# Altium PCB ESP32_Seperate.PcbDoc
Units mil, origin at the board's own origin, x right, y up, seen from the top; angles counter-clockwise.
Board outline 1290 x 2360 mil, 4 copper layers (Top Layer, GND, PWR, Bottom Layer), stack 23.756 mil thick; 19 components, 40 nets, 130 pads, 34 vias.
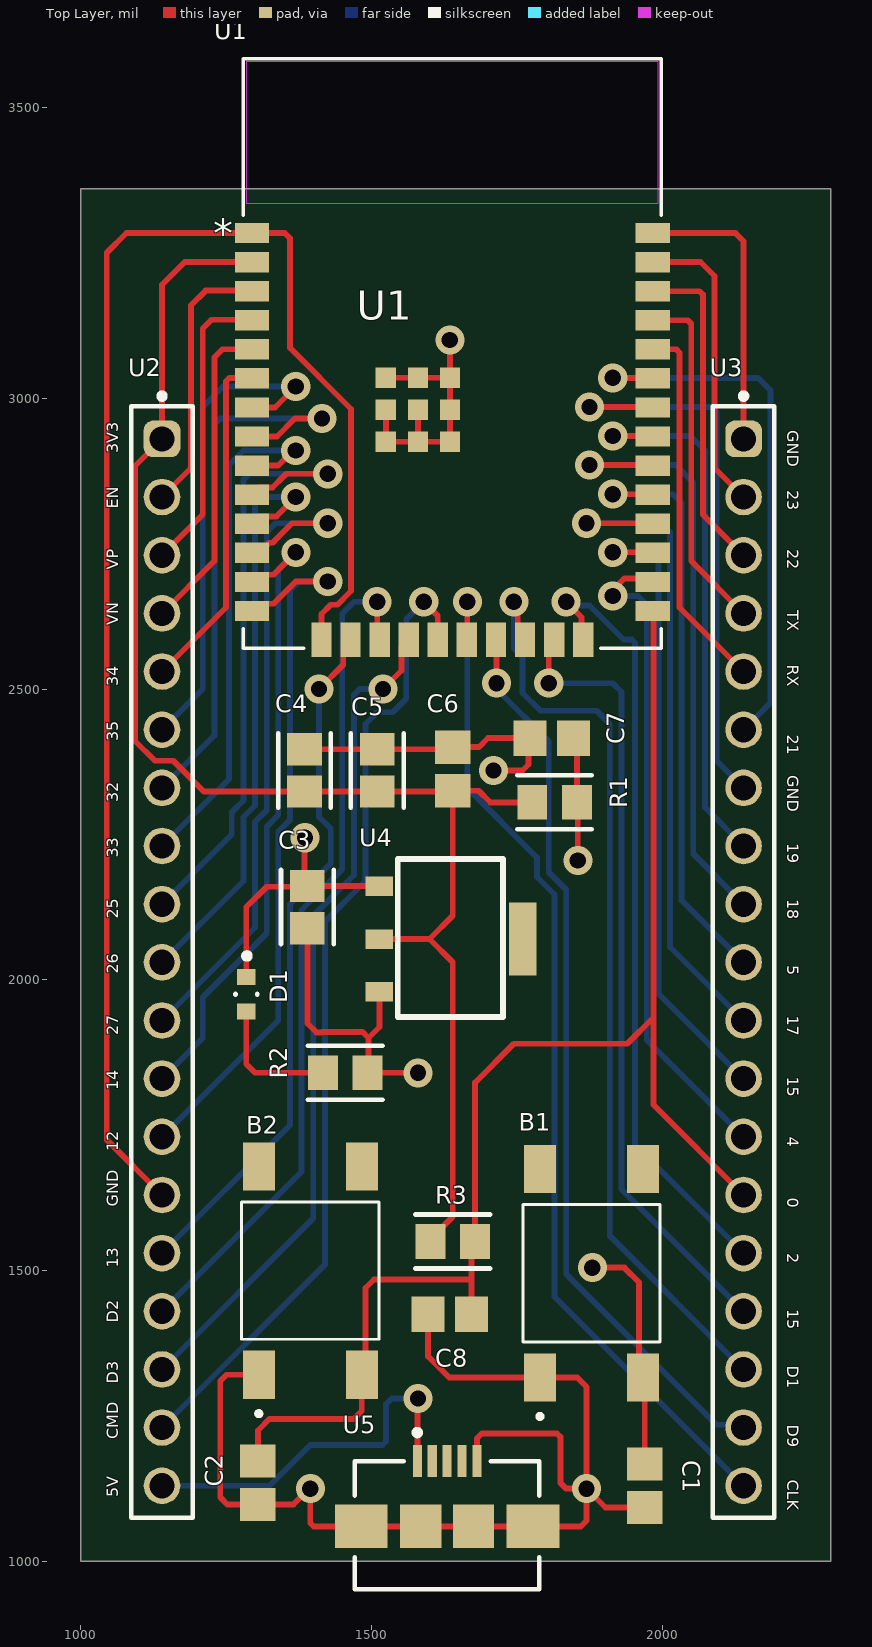
[diagram p0: Top Layer view]
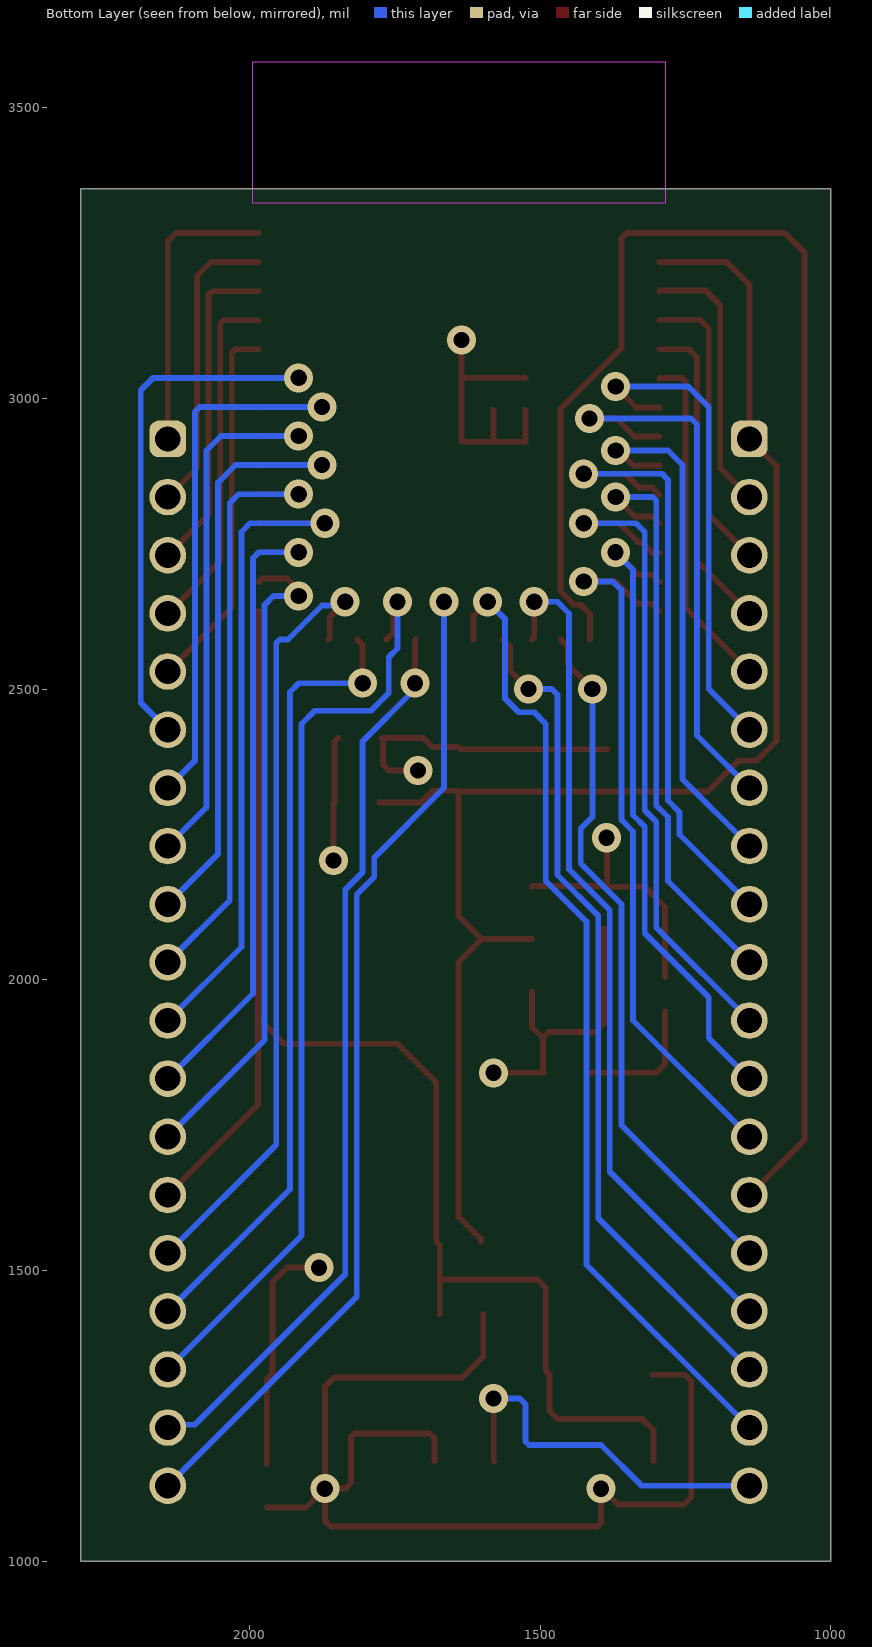
[diagram p1: Bottom Layer view, seen from below]
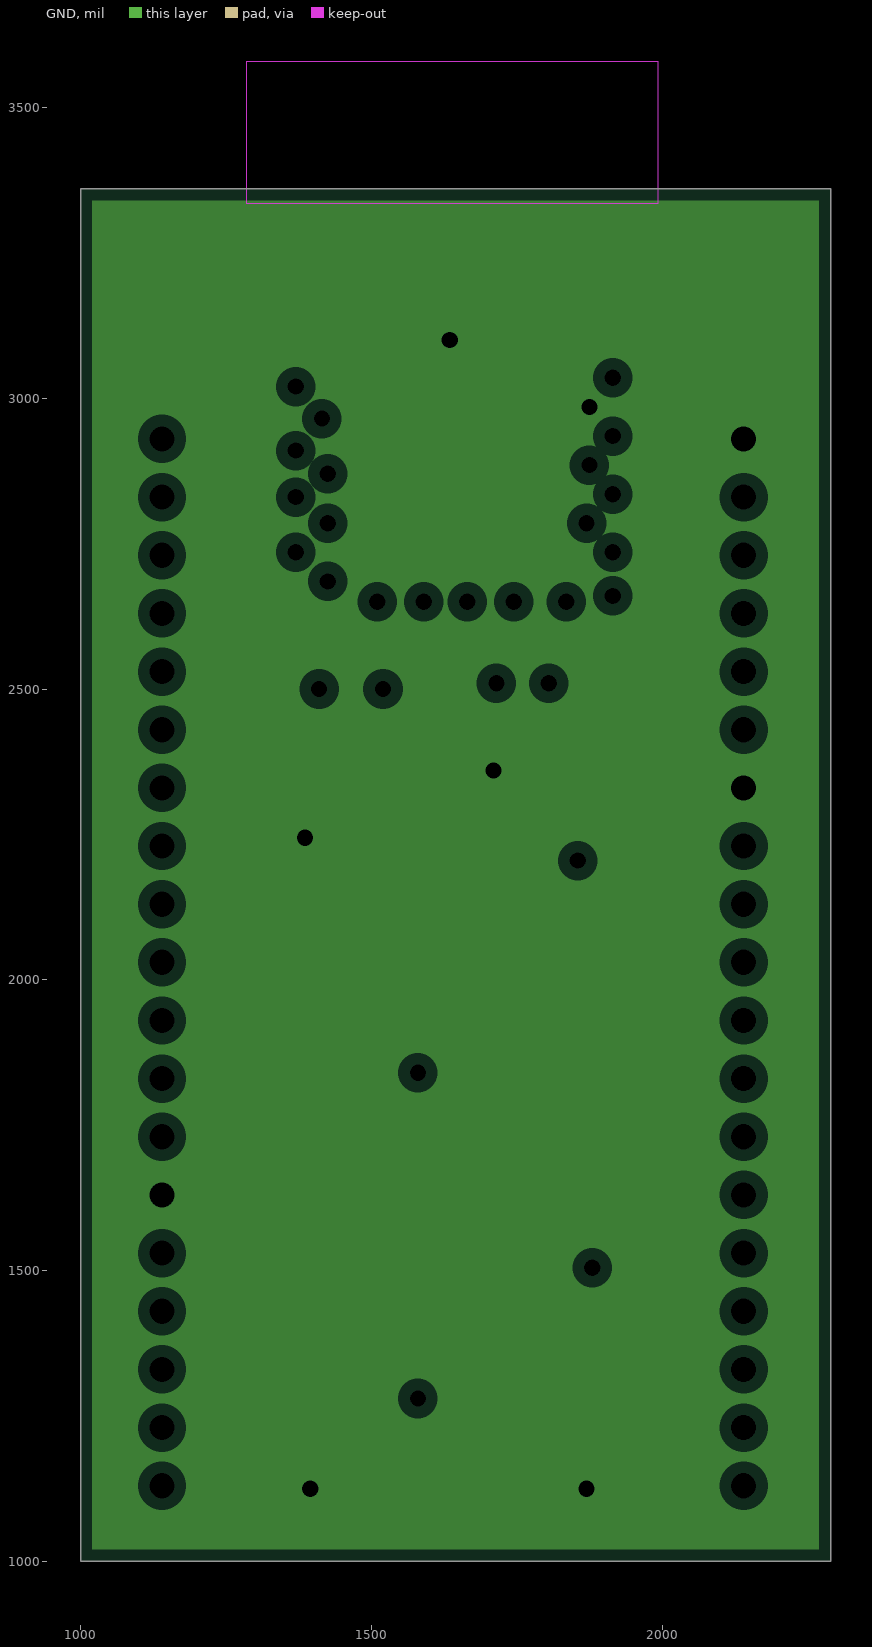
[diagram p2: GND, clearances drawn from the general rule]
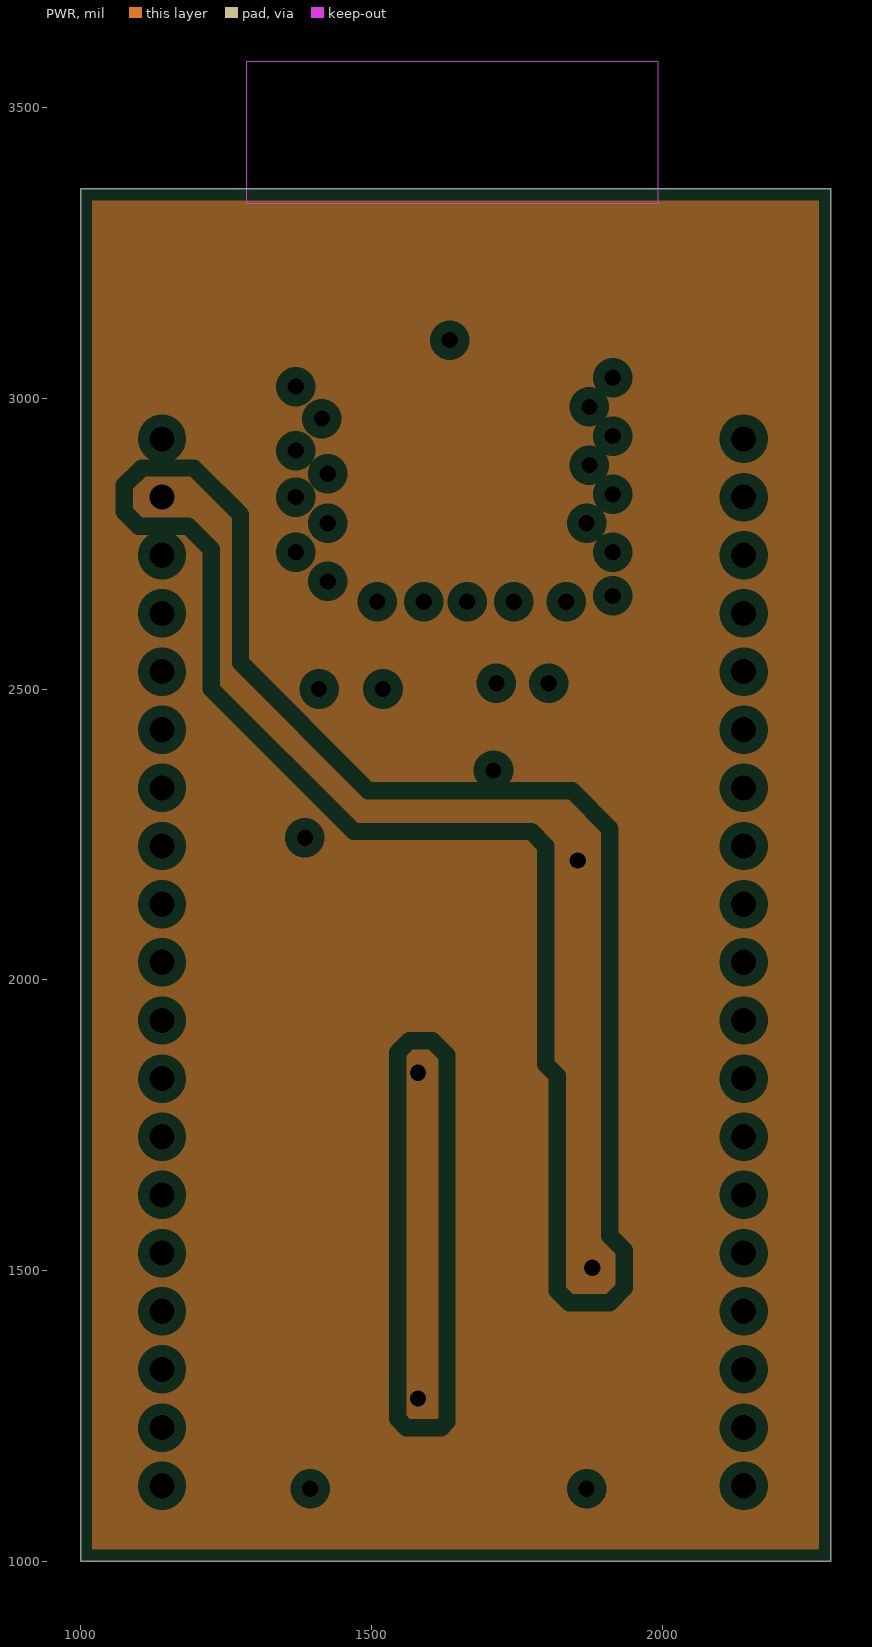
[diagram p3: PWR, clearances drawn from the general rule]
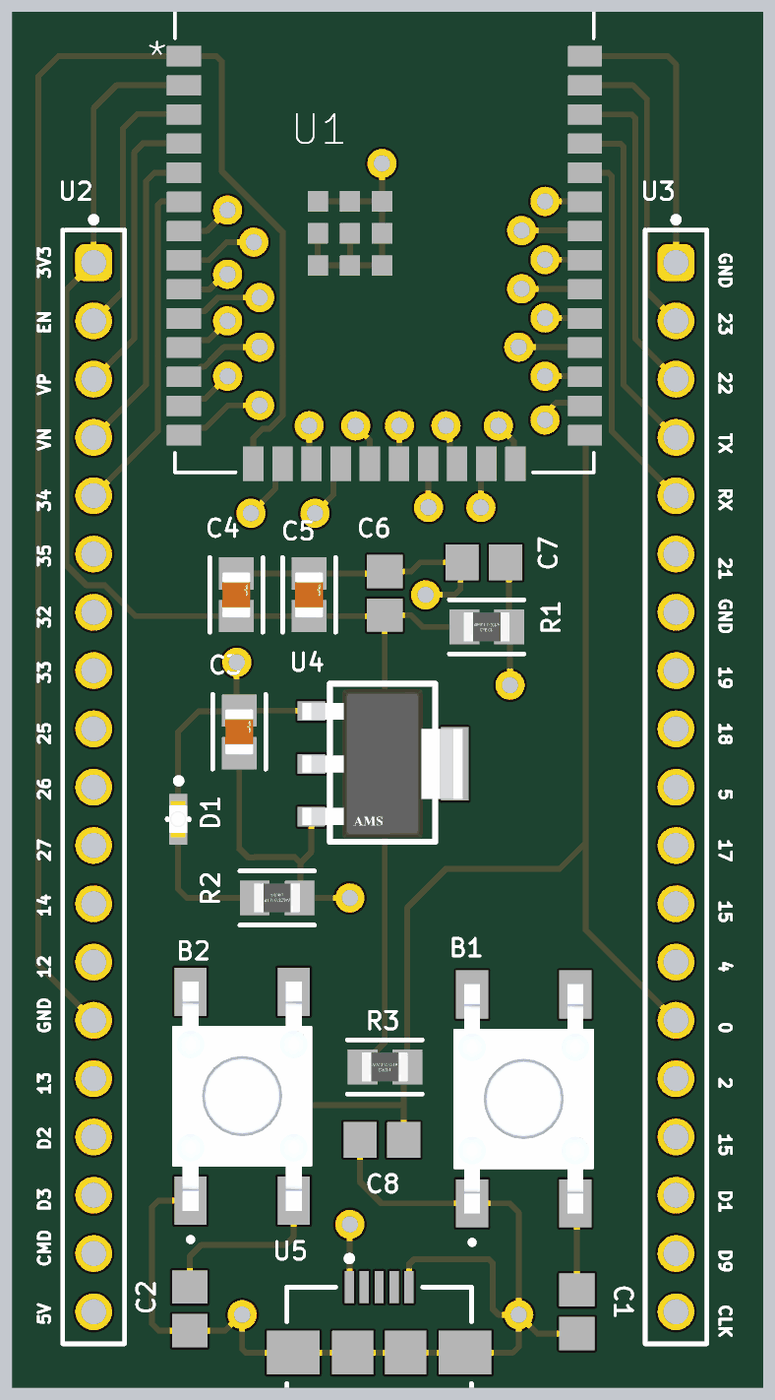
[diagram p4: 3D render of the assembled board from above, using the file's embedded part models]

## Layer stack, top to bottom
Top Solder: solder mask 0.4, Solder Resist, Dk 3.5
Top Layer: signal copper 1.4
Dielectric 2: prepreg 2.8, PP-006, Dk 4.1
GND: plane copper 1.378, net GND
Dielectric 1: dielectric 12.6, FR-4, Dk 4.8
PWR: plane copper 1.378
Dielectric 3: prepreg 2.8, PP-006, Dk 4.1
Bottom Layer: signal copper 1.4
Bottom Solder: solder mask 0.4, Solder Resist, Dk 3.5

## Board outline
1000,1000 2290,1000 2290,3360 1000,3360

## Design rules (kind name [scope] priority, off if disabled: settings)
Clearance [All] p1: gap=5 ignorepadtopadclearanceinfootprint=FALSE
PlaneClearance [All] p1: clearance=20
PlaneConnect [All] p1: planeconnectstyle=Relief reliefexpansion=20 reliefentries=4 reliefconductorwidth=10 reliefairgap=10
PolygonConnect [All] p1: connectstyle=Relief reliefconductorwidth=10 reliefentries=4 polygonreliefangle="90 Angle" airgapwidth=10
RoutingVias [All] p1: holewidth=28 width=50 viastyle="Through Hole" minholewidth=28 minwidth=50 maxholewidth=28 maxwidth=50
SolderMaskExpansion [All] p1: expansion=4 istentingtop=FALSE
SupplyNets "Schematic Supply Nets" [InNet('GND')] p1: voltage=0.000
Width [All] p1: maxlimit=10 minlimit=10 preferedwidth=10
28 further rules are at their usual default settings.

## Classes and differential pairs
component class Main_board: C7 R1 U2 U3
component class ESP32: C5 C6 U1
component class Designator: C3 C4 R2 U4
component class Connector: U5
component class Buttons: B1 B2 C1 C2

## Components (designator, comment, footprint, x,y, rotation, side; value= is the part's Value field where it differs from the comment)
B1 "EN" SW_TS04-66-43-BK-100-SMT 1878.53,1495.2 r90 top
B2 "Boot" SW_TS04-66-43-BK-100-SMT 1395,1500 r90 top
C1 "100nF" CAPC2013X140X45ML15T25 1970,1130 r90 top
C2 "100nF" CAPC2013X140X45ML15T25 1305,1135 r90 top
C3 "22u" FP-GRM21B-0_15-IPC_A 1390,2125 r90 top value=22µF
C4 "22u" FP-GRM21B-0_15-IPC_A 1385,2360 r90 top value=22µF
C5 "22u" FP-GRM21B-0_15-IPC_A 1510,2360 r90 top value=22µF
C6 "100nF" CAPC2013X140X45ML15T25 1640,2362.6 r270 top
C7 "100nF" CAPC2013X140X45ML15T25 1809.97,2415.59 r0 top
C8 "100nF" CAPC2013X140X45ML15T25 1635,1425 r0 top (schematic designator C7)
D1 "Comment" FP-APHD1608LZGCK-MFG 1285,1975 r270 top
R1 "10k" FP-CRGCQ0805-IPC_A 1815,2305 r180 top value=10kΩ
R2 "2k" FP-CRGCQ0805-IPC_A 1455,1840 r0 top value=2kΩ
R3 "10k" FP-CRGCQ0805-IPC_A 1640,1550 r180 top value=10kΩ (schematic designator R1)
U1 "ESP32-WROOM-32E-N4" ESP32­WROOM­32E_EXP 1639.2,3077 r0 top
U2 "19 Pin Headers (left)" "19 Pin headers" 1140,2930 r0 top
U3 "19 Pin Headers (right)" "19 Pin headers" 2140,2930 r0 top
U4 "AMS1117-3.3" AMS1117 1513.94,2160.55 r0 top
U5 "10104110-0001LF (2)" FCI-10104110-0001LF_V 1630.28,1116.1 r0 top

## Footprints (in the part's own frame and the unit in brackets; to place one, negate y for a bottom-side part, rotate by r counter-clockwise, add the part's x,y. Pads: shape width x height; smd on the part's side, far side on the other; paste and mask are expansions set on the pad)
"19 Pin headers" [mm]
  rrect50% 1.6x1.6 hole 1.1: 1(0,0)
  round 1.6 hole 1.1: 2(0,-2.54) 3(0,-5.08) 4(0,-7.62) 5(0,-10.16) 6(0,-12.7) 7(0,-15.24) 8(0,-17.78) 9(0,-20.32) 10(0,-22.86) 11(0,-25.4) 12(0,-27.94) 13(0,-30.48) 14(0,-33.02) 15(0,-35.56) 16(0,-38.1) 17(0,-40.64) 18(0,-43.18) 19(0,-45.72)
  silkscreen extent -1.35,-47.12 1.35,1.99
AMS1117 [mm]
  rect 1.2x0.85 smd: 1(0,0) 2(0,-4.6) 2(0,-2.3)
  rect 1.2x3.2 smd: 4(6.25,-2.3)
  silkscreen extent 0.8,-5.7 5.4,1.2, body extent -1.15,-5.8 7.35,1.2, height 0.25
CAPC2013X140X45ML15T25 [mm] "Chip Capacitor, 2-Leads, Body 2.00x1.25mm, IPC Low Density"
  rect 1.45x1.55 smd: 1(-0.95,0) 2(0.95,0)
  body extent -1.08,-0.7 1.07,0.7, height 1.4
ESP32­WROOM­32E_EXP [mil]
  rect 59x35 smd paste+0 mask+0: 1(-344.5,207.1) 2(-344.5,157.1) 3(-344.5,107.1) 4(-344.5,57.1) 5(-344.5,7.1) 6(-344.5,-42.9) 7(-344.5,-92.9) 8(-344.5,-142.9) 9(-344.5,-192.9) 10(-344.5,-242.9) 11(-344.5,-292.9) 12(-344.5,-342.9) 13(-344.5,-392.9) 14(-344.5,-442.9) 25(344.5,-442.9) 26(344.5,-392.9) 27(344.5,-342.9) 28(344.5,-292.9) 29(344.5,-242.9) 30(344.5,-192.9) 31(344.5,-142.9) 32(344.5,-92.9) 33(344.5,-42.9) 34(344.5,7.1) 35(344.5,57.1) 36(344.5,107.1) 37(344.5,157.1) 38(344.5,207.1)
  rect 35x59 smd paste+0 mask+0: 15(-225,-492.15) 16(-175,-492.15) 17(-125,-492.15) 18(-75,-492.15) 19(-25,-492.15) 20(25,-492.15) 21(75,-492.15) 22(125,-492.15) 23(175,-492.15) 24(225,-492.15)
  rect 35x35 smd paste+0 mask+0: 39(-59.1,-96.9) 40(-114.2,-41.8) 41(-114.2,-96.9) 42(-114.2,-152) 43(-59.1,-152) 44(-4,-152) 45(-4,-96.9) 46(-4,-41.8) 47(-59.1,-41.8)
  Keep-Out Layer region: 354.5,258 354.5,502 -354.5,502 -354.5,258
  silkscreen extent -360,-507 360,507
FCI-10104110-0001LF_V [mm] "SMD, 5-Leads, Body 8.06x5.6mm, Pitch 0.65mm"
  rect 0.4x1.4 smd: 1(-1.3,1.425) 2(-0.65,1.425) 3(0,1.425) 4(0.65,1.425) 5(1.3,1.425)
  rect 1.8x1.9 smd: 6(-1.15,-1.425) 7(1.15,-1.425)
  rect 2.3x1.9 smd: 8(-3.75,-1.425) 9(3.75,-1.425)
  silkscreen extent -4.03,-4.17 4.03,2.8, body extent -4.03,-4.17 4.03,1.43, height 2.95
FP-APHD1608LZGCK-MFG [mm]
  rect 0.7x0.8 smd paste+0 mask+0: 1(-0.75,0) 2(0.75,0)
  silkscreen extent -1.8,-0.48 0.03,0.48, body extent -1.2,-0.58 1.2,0.58, height 0.25
FP-CRGCQ0805-IPC_A [mil]
  rect 51.42x59.44 smd paste+0 mask+0: 1(-38.43,0) 2(38.43,0)
  silkscreen extent -64,-46 64,46, body extent -84,-49 84,49, height 10
FP-GRM21B-0_15-IPC_A [mil]
  rect 55.34x59.38 smd paste+0 mask+0: 1(-36.47,0) 2(36.47,0)
  silkscreen extent -64,-45 64,45, body extent -84,-49 84,49, height 10
SW_TS04-66-43-BK-100-SMT [mm]
  rect 2.1x1.4 smd: 1(-4.55,2.25) 2(-4.55,-2.25) 3(4.55,2.25) 4(4.55,-2.25)
  silkscreen extent -6.35,-3 3,3, body extent -5,-3 5,3, height 4.3

## Part data
B1 B2: library part TS04-66-50-BK-160-SMT-TR_1, "6 x 6 mm, 5 mm Actuator Height, 160 gf, Black, Surface Mount, SPST, Tactile Switch", Manufacturer="Same Sky", Manufacturer Part Number=TS04-66-50-BK-160-SMT-TR, Supplier Part Number=2223-TS04-66-50-BK-160-SMT-TR-ND, Category="Tactile Switches", ComponentLink1Description=https://datasheet.octopart.com:443/TS04-66-50-BK-160-SMT-TR-Same-Sky-datasheet-183540778.pdf?src-supplier=Same+Sky, ComponentLink1URL=https://datasheet.octopart.com:443/TS04-66-50-BK-160-SMT-TR-Same-Sky-datasheet-183540778.pdf?src-supplier=Same+Sky, ComponentLink2Description=https://datasheet.octopart.com:443/TS04-66-50-BK-160-SMT-TR-Same-Sky-datasheet-181920469.pdf?src-supplier=Same+Sky, ComponentLink2URL=https://datasheet.octopart.com:443/TS04-66-50-BK-160-SMT-TR-Same-Sky-datasheet-181920469.pdf?src-supplier=Same+Sky, ComponentLink3Description=https://datasheet.octopart.com:443/TS04-66-50-BK-160-SMT-TR-CUI-Devices-datasheet-175928975.pdf?src-supplier=Same+Sky, ComponentLink3URL=https://datasheet.octopart.com:443/TS04-66-50-BK-160-SMT-TR-CUI-Devices-datasheet-175928975.pdf?src-supplier=Same+Sky, ComponentLink4Description=https://datasheet.octopart.com:443/TS04-66-50-BK-160-SMT-TR-CUI-Devices-datasheet-155929909.pdf?src-supplier=Same+Sky, ComponentLink4URL=https://datasheet.octopart.com:443/TS04-66-50-BK-160-SMT-TR-CUI-Devices-datasheet-155929909.pdf?src-supplier=Same+Sky, ComponentLink5Description=https://datasheet.octopart.com:443/TS04-66-50-BK-160-SMT-TR-CUI-Devices-datasheet-180438940.pdf?src-supplier=IHS, ComponentLink5URL=https://datasheet.octopart.com:443/TS04-66-50-BK-160-SMT-TR-CUI-Devices-datasheet-180438940.pdf?src-supplier=IHS, ComponentLink6Description=https://datasheet.octopart.com:443/TS04-66-50-BK-160-SMT-TR-Same-Sky-datasheet-182881590.pdf?src-supplier=Master+Electronics, ComponentLink6URL=https://datasheet.octopart.com:443/TS04-66-50-BK-160-SMT-TR-Same-Sky-datasheet-182881590.pdf?src-supplier=Master+Electronics, ComponentLink7Description=https://datasheet.octopart.com:443/TS04-66-50-BK-160-SMT-TR-Same-Sky-datasheet-189105765.pdf?src-supplier=Master+Electronics, ComponentLink7URL=https://datasheet.octopart.com:443/TS04-66-50-BK-160-SMT-TR-Same-Sky-datasheet-189105765.pdf?src-supplier=Master+Electronics, ComponentLink8Description=https://datasheet.octopart.com:443/TS04-66-50-BK-160-SMT-TR-Same-Sky-datasheet-188930959.pdf?src-supplier=TME, ComponentLink8URL=https://datasheet.octopart.com:443/TS04-66-50-BK-160-SMT-TR-Same-Sky-datasheet-188930959.pdf?src-supplier=TME, ComponentLink9Description=https://octopart.com:443/opatz8j6/c1?t=AHJHVxjaiIDIr6H_ItDqsJeDJqxcW_gJHqcHV2sr14xMipfx-HDzg_f0vkasGYHy5q-Btyt4jzHIYsIXAp8M-MkPAGFwjUVKwjpKunO9EjmQ9NoVu9p4HWs04ZXCmleWgcsYh-4RxiTzSsoULU2T2rz17cMXYYLK9_ziMcA7OGPXXbacYiPMCPpI60niI4dc0C9vNkjd65Jl5QkLrYSw83J7uaIpN8OeAtGX54ooF_yVEqS3W8UGSl3Fipt3e-uZfnOteh1ynDY5inV3vA_T2G7-jmG30-JmWZ9wvWQwyL_V03hDFAcYksLWHd1aRsOPWTbxvmd88SKpkAjFm5xu5x-cK5AUD6xUpAL7lh0xeIYzTPI4ZOg&src-supplier=Compliance+Statements, ComponentLink9URL=https://octopart.com:443/opatz8j6/c1?t=AHJHVxjaiIDIr6H_ItDqsJeDJqxcW_gJHqcHV2sr14xMipfx-HDzg_f0vkasGYHy5q-Btyt4jzHIYsIXAp8M-MkPAGFwjUVKwjpKunO9EjmQ9NoVu9p4HWs04ZXCmleWgcsYh-4RxiTzSsoULU2T2rz17cMXYYLK9_ziMcA7OGPXXbacYiPMCPpI60niI4dc0C9vNkjd65Jl5QkLrYSw83J7uaIpN8OeAtGX54ooF_yVEqS3W8UGSl3Fipt3e-uZfnOteh1ynDY5inV3vA_T2G7-jmG30-JmWZ9wvWQwyL_V03hDFAcYksLWHd1aRsOPWTbxvmd88SKpkAjFm5xu5x-cK5AUD6xUpAL7lh0xeIYzTPI4ZOg&src-supplier=Compliance+Statements, ComponentLink10Description=https://octopart.com:443/opatz8j6/c1?t=r1RK5IYUaob_85_1MSHGNq720LrhxWIvMn5DWdcJs86yyX1sCCzkutHExn9MWrIEn17t5vGoIZESqBBoujGJDEtnxSOKhQoF_HVCF4IjS0uNejDB1Hl06RViT7vLEqlS2nwCB_zZjOM2FBR17Cn3AygDXFz4irEFvfs5L25X4mfGCJscXkgX4qD28LidoQEhTj1XIrzkPBX_u6sUrCtXeGFsnQuDshvHBQ8JL4sZA9KNYQB46zrK0ZjbAVBq3PHdFimw1lZsdT1205N9iIZQ-sSyoeN1xzltvm_fFJtkrMx3uypwSCqRIIazHEyIss7CzzZHpr8HJ3IPX8N9BpeGudVq5MGf4iJVtCZae_yLFL5H-ssn_Jcg6fiM&src-supplier=Compliance+Statements, ComponentLink10URL=https://octopart.com:443/opatz8j6/c1?t=r1RK5IYUaob_85_1MSHGNq720LrhxWIvMn5DWdcJs86yyX1sCCzkutHExn9MWrIEn17t5vGoIZESqBBoujGJDEtnxSOKhQoF_HVCF4IjS0uNejDB1Hl06RViT7vLEqlS2nwCB_zZjOM2FBR17Cn3AygDXFz4irEFvfs5L25X4mfGCJscXkgX4qD28LidoQEhTj1XIrzkPBX_u6sUrCtXeGFsnQuDshvHBQ8JL4sZA9KNYQB46zrK0ZjbAVBq3PHdFimw1lZsdT1205N9iIZQ-sSyoeN1xzltvm_fFJtkrMx3uypwSCqRIIazHEyIss7CzzZHpr8HJ3IPX8N9BpeGudVq5MGf4iJVtCZae_yLFL5H-ssn_Jcg6fiM&src-supplier=Compliance+Statements, ComponentLink11Description=https://octopart.com:443/opatz8j6/c1?t=3BD6yHY4TMlPV1HdH1DfP3VwhdawlDk5uvE--lE0_OK2pMAHtXMzIWognZT8Kptg4hg-lGvkc8pM6295M0wnT2xUdro5X27lLiJF0vFSPDXW_Zl-47ruo4eQI3juyTTFsaQzGMRqd6HKVavC7jLqvg3e4wdyFRwHDNXvJFlQdNWuFbKytLsG4A2-4ydZK6E80O1irTcqN9MKGvI5XzA0YOv-CaSdIebfUu8zXvQJfIAIYzNrnKqCZgH7inlQIWZHKFLA1siN4vk2QxKmFGOy5iNd7qtG1c_EzzRGUuEk66hak1i00a4FRPnHP1sGNuLupUBDn3O7toNEWVdlsVQMt_vgglZqqjFBUsOjgP800DIecR_OMlE&src-supplier=Compliance+Statements, ComponentLink11URL=https://octopart.com:443/opatz8j6/c1?t=3BD6yHY4TMlPV1HdH1DfP3VwhdawlDk5uvE--lE0_OK2pMAHtXMzIWognZT8Kptg4hg-lGvkc8pM6295M0wnT2xUdro5X27lLiJF0vFSPDXW_Zl-47ruo4eQI3juyTTFsaQzGMRqd6HKVavC7jLqvg3e4wdyFRwHDNXvJFlQdNWuFbKytLsG4A2-4ydZK6E80O1irTcqN9MKGvI5XzA0YOv-CaSdIebfUu8zXvQJfIAIYzNrnKqCZgH7inlQIWZHKFLA1siN4vk2QxKmFGOy5iNd7qtG1c_EzzRGUuEk66hak1i00a4FRPnHP1sGNuLupUBDn3O7toNEWVdlsVQMt_vgglZqqjFBUsOjgP800DIecR_OMlE&src-supplier=Compliance+Statements, ComponentLink12Description=https://octopart.com:443/opatz8j6/c1?t=K3camy5c4Ucy_9yJ3KoVII-gY7VkFhW7P0bbZ5t4-ZUOrBjcTQp1Z0CfWV0BYFVb-fHwcr_lEptVhsKeusTQzSTvOQJoYc4MNj1Xi9Ce_YgscQjK650kyvQ9iLNiSq5mGOGzGFNePsfH6U4F6nSSG09sMoZOKXesSp3A9fEB81Ryg-V7UjN_ervOIvTSSU2pt4tfCkzqxWFsAWFQreVmjyuPQN_MUGuEn3zVyQx51WI-SEu-6b7QOUpGr0zjb-yB96bbP6EohUbR0VIhPKN-WK5D9Ild7BKF3VkdDbQsJZ5I28NoVyQVl5xozYnhRN5Qb2QQksLBhOvdnNRmi85i763lg0Pnr8-dc4-8tEY2vuhnMptderCnXY8-&src-supplier=Compliance+Statements, ComponentLink12URL=https://octopart.com:443/opatz8j6/c1?t=K3camy5c4Ucy_9yJ3KoVII-gY7VkFhW7P0bbZ5t4-ZUOrBjcTQp1Z0CfWV0BYFVb-fHwcr_lEptVhsKeusTQzSTvOQJoYc4MNj1Xi9Ce_YgscQjK650kyvQ9iLNiSq5mGOGzGFNePsfH6U4F6nSSG09sMoZOKXesSp3A9fEB81Ryg-V7UjN_ervOIvTSSU2pt4tfCkzqxWFsAWFQreVmjyuPQN_MUGuEn3zVyQx51WI-SEu-6b7QOUpGr0zjb-yB96bbP6EohUbR0VIhPKN-WK5D9Ild7BKF3VkdDbQsJZ5I28NoVyQVl5xozYnhRN5Qb2QQksLBhOvdnNRmi85i763lg0Pnr8-dc4-8tEY2vuhnMptderCnXY8-&src-supplier=Compliance+Statements, Lifecycle Status=Production, Number of Positions=2, Pricing="5000=0.10735 (USD)", REACH SVHC=Yes, RoHS=Compliant, Supplier=DigiKey
C1 C2 C6 C7 C8: library part GCM21BR71E104KA37L, "Ceramic Capacitor, Ceramic, 25V, 10% +Tol, 10% -Tol, X7R, 15% TC, 0.1uF, Surface Mount, 0805", Case Code (Imperial)=0805, Case Code (Metric)=2012, Dielectric=X7R, Dielectric Material=Ceramic, Manufacturer=Murata, Manufacturer Lifecycle Status=NRND, Max Operating Temperature=125°C, Min Operating Temperature=-55°C, Ratings=AEC-Q200, Supplier Part Number=490-14779-1-ND, Tolerance=10%, Voltage Rating=25V, Case/Package=0805, Category="Ceramic Capacitors", ComponentLink1Description=https://datasheet.octopart.com:443/GCM21BR71E104KA37L-Murata-datasheet-141268656.pdf?src-supplier=Geoflip, ComponentLink1URL=https://datasheet.octopart.com:443/GCM21BR71E104KA37L-Murata-datasheet-141268656.pdf?src-supplier=Geoflip, ComponentLink2Description=https://datasheet.octopart.com:443/GCM21BR71E104KA37L-Murata-datasheet-140660253.pdf?src-supplier=Ciiva, ComponentLink2URL=https://datasheet.octopart.com:443/GCM21BR71E104KA37L-Murata-datasheet-140660253.pdf?src-supplier=Ciiva, ComponentLink3Description=https://datasheet.octopart.com:443/GCM21BR71E104KA37L-Murata-datasheet-138719617.pdf?src-supplier=Ciiva, ComponentLink3URL=https://datasheet.octopart.com:443/GCM21BR71E104KA37L-Murata-datasheet-138719617.pdf?src-supplier=Ciiva, ComponentLink4Description=https://datasheet.octopart.com:443/GCM21BR71E104KA37L-Murata-datasheet-128592896.pdf?src-supplier=X-ON, ComponentLink4URL=https://datasheet.octopart.com:443/GCM21BR71E104KA37L-Murata-datasheet-128592896.pdf?src-supplier=X-ON, ComponentLink5Description=https://datasheet.octopart.com/GCM21BR71E104KA37L-Murata-datasheet-14404970.pdf, ComponentLink5URL=https://datasheet.octopart.com/GCM21BR71E104KA37L-Murata-datasheet-14404970.pdf, ComponentLink6Description=http://sigma.octopart.com:80/reach_statement/Murata-company-16.pdf?src-supplier=Compliance+Statements, ComponentLink6URL=http://sigma.octopart.com:80/reach_statement/Murata-company-16.pdf?src-supplier=Compliance+Statements, Depth=1.25mm, Height=1.25mm, Length=2mm, Lifecycle Status=NRND, Manufacturer Part Number=GCM21BR71E104KA37L, Mounting Technology="Surface Mount", Number of Terminals=2, Pricing="1=0.35, 10=0.208, 50=0.1528, 100=0.1358, 500=0.10726, 1000=0.09846 (USD)", Radiation Hardening=No, REACH SVHC=Yes, RoHS=Compliant, Schedule B="8532240020, 8532240020|8532240020|8532240020|8532240020|8532240020", Stock=12316, Supplier=DigiKey, Termination=SMD/SMT, Voltage Rating (DC)=25V, Width=1.25mm
C3 C4 C5: library part GRM21BR61A226ME51L, "0805 22 uF 10 V ±20% Tolerance X5R SMT Multilayer Ceramic Capacitor", Case Code (Imperial)=0805, Case Code (Metric)=2012, Dielectric=X5R, Dielectric Material=Ceramic, Manufacturer=Murata, Manufacturer Lifecycle Status="IN PRODUCTION", Max Operating Temperature=85°C, Min Operating Temperature=-55°C, Supplier Part Number=490-10511-1-ND, Tolerance=20%, Voltage Rating=10V, Case/Package=0805, Category="Ceramic Capacitors", ComponentLink1Description=https://datasheet.octopart.com:443/GRM21BR61A226ME51L-Murata-datasheet-46741949.pdf?src-supplier=element14+APAC, ComponentLink1URL=https://datasheet.octopart.com:443/GRM21BR61A226ME51L-Murata-datasheet-46741949.pdf?src-supplier=element14+APAC, ComponentLink2Description=https://datasheet.octopart.com:443/GRM21BR61A226ME51L-Murata-datasheet-141278167.pdf?src-supplier=Geoflip, ComponentLink2URL=https://datasheet.octopart.com:443/GRM21BR61A226ME51L-Murata-datasheet-141278167.pdf?src-supplier=Geoflip, ComponentLink3Description=https://datasheet.octopart.com:443/GRM21BR61A226ME51L-Murata-datasheet-165579666.pdf?src-supplier=TME, ComponentLink3URL=https://datasheet.octopart.com:443/GRM21BR61A226ME51L-Murata-datasheet-165579666.pdf?src-supplier=TME, ComponentLink4Description=https://datasheet.octopart.com:443/GRM21BR61A226ME51L-Murata-datasheet-81455648.pdf?src-supplier=TME, ComponentLink4URL=https://datasheet.octopart.com:443/GRM21BR61A226ME51L-Murata-datasheet-81455648.pdf?src-supplier=TME, ComponentLink5Description=https://datasheet.octopart.com:443/GRM21BR61A226ME51L-Murata-datasheet-140707522.pdf?src-supplier=Ciiva, ComponentLink5URL=https://datasheet.octopart.com:443/GRM21BR61A226ME51L-Murata-datasheet-140707522.pdf?src-supplier=Ciiva, ComponentLink6Description=https://datasheet.octopart.com:443/GRM21BR61A226ME51L-Murata-datasheet-138744834.pdf?src-supplier=Ciiva, ComponentLink6URL=https://datasheet.octopart.com:443/GRM21BR61A226ME51L-Murata-datasheet-138744834.pdf?src-supplier=Ciiva, ComponentLink7Description=https://datasheet.octopart.com:443/GRM21BR61A226ME51L-Murata-datasheet-22122223.pdf?src-supplier=Future+Electronics, ComponentLink7URL=https://datasheet.octopart.com:443/GRM21BR61A226ME51L-Murata-datasheet-22122223.pdf?src-supplier=Future+Electronics, ComponentLink8Description=https://datasheet.octopart.com/GRM21BR61A226ME51L-Murata-datasheet-12515295.pdf, ComponentLink8URL=https://datasheet.octopart.com/GRM21BR61A226ME51L-Murata-datasheet-12515295.pdf, ComponentLink9Description=https://datasheet.octopart.com/GRM21BR61A226ME51L-Murata-datasheet-12510076.pdf, ComponentLink9URL=https://datasheet.octopart.com/GRM21BR61A226ME51L-Murata-datasheet-12510076.pdf, ComponentLink10Description=https://datasheet.octopart.com/GRM21BR61A226ME51L-Murata-datasheet-11978611.pdf, ComponentLink10URL=https://datasheet.octopart.com/GRM21BR61A226ME51L-Murata-datasheet-11978611.pdf, ComponentLink11Description=https://datasheet.octopart.com/GRM21BR61A226ME51L-Murata-datasheet-10025737.pdf, ComponentLink11URL=https://datasheet.octopart.com/GRM21BR61A226ME51L-Murata-datasheet-10025737.pdf, ComponentLink12Description=https://datasheet.octopart.com/GRM21BR61A226ME51L-Murata-datasheet-8819587.pdf, ComponentLink12URL=https://datasheet.octopart.com/GRM21BR61A226ME51L-Murata-datasheet-8819587.pdf, ComponentLink13Description=https://datasheet.octopart.com/GRM21BR61A226ME51L-Murata-datasheet-14402366.pdf, ComponentLink13URL=https://datasheet.octopart.com/GRM21BR61A226ME51L-Murata-datasheet-14402366.pdf, ComponentLink14Description=http://sigma.octopart.com:80/reach_statement/Murata-company-16.pdf?src-supplier=Compliance+Statements, ComponentLink14URL=http://sigma.octopart.com:80/reach_statement/Murata-company-16.pdf?src-supplier=Compliance+Statements, Depth=1.25mm, Height=1.25mm, Lead Free="Lead Free", Length=2mm, Lifecycle Status=Production, Manufacturer Part Number=GRM21BR61A226ME51L, Material=Ceramic, Mounting Technology="Surface Mount", Number of Terminals=2, Packaging="Cut Tape", Pricing="1=0.19, 10=0.111, 50=0.0788, 100=0.069, 500=0.0526, 1000=0.04756 (USD)", Radiation Hardening=No, REACH SVHC=Yes, RoHS=Compliant, Schedule B="8532240020, 8532240020|8532240020, 8532240020|8532240020|8532240020, 8532240020|8532240020|8532240020|8532240020", Stock=246273, Supplier=DigiKey, Termination=SMD/SMT, Thickness=1.25mm, Voltage Rating (DC)=10V, Weight=9.49709mg, Width=1.25mm
D1: library part APHD1608LZGCK, "Standard LEDs; SMD 0608 Compact Dome Lens LED; 1.6x0.8 mm; Green; (Cut Reel)"
R1 R3: library part CRGCQ0805J10K, "Res Thick Film 0805 10K Ohm 5% 0.125W(1/8W) ±100ppm/C Pad SMD Automotive T/R", Ambient Temperature Range High=70°C, Manufacturer="TE Connectivity", Manufacturer Lifecycle Status=ACTIVE, Max Operating Temperature=155°C, Min Operating Temperature=-55°C, Operating Supply Voltage=150V, Power Dissipation=125mW, Supplier Part Number=A130140CT-ND, Temperature Coefficient=100ppm/°C, Tolerance=5%, Category="Chip SMD Resistors", China RoHS=Non-Compliant, ComponentLink1Description=https://datasheet.octopart.com:443/CRGCQ0805J10K-TE-Connectivity-datasheet-114679081.pdf?src-supplier=Master+Electronics, ComponentLink1URL=https://datasheet.octopart.com:443/CRGCQ0805J10K-TE-Connectivity-datasheet-114679081.pdf?src-supplier=Master+Electronics, ComponentLink2Description=https://datasheet.octopart.com:443/2-2176342-5-TE-Connectivity---AMP-datasheet-189108688.pdf?src-supplier=Master+Electronics, ComponentLink2URL=https://datasheet.octopart.com:443/2-2176342-5-TE-Connectivity---AMP-datasheet-189108688.pdf?src-supplier=Master+Electronics, ComponentLink3Description=https://datasheet.octopart.com:443/CRGCQ0805J10K-TE-Connectivity-datasheet-179161841.pdf?src-supplier=IHS, ComponentLink3URL=https://datasheet.octopart.com:443/CRGCQ0805J10K-TE-Connectivity-datasheet-179161841.pdf?src-supplier=IHS, ComponentLink4Description=https://sigma.octopart.com:443/114702769/technical_drawing/TE-Connectivity-CRGCQ0805J10K.pdf?src-supplier=Sager+Electronics, ComponentLink4URL=https://sigma.octopart.com:443/114702769/technical_drawing/TE-Connectivity-CRGCQ0805J10K.pdf?src-supplier=Sager+Electronics, Composition="Thick Film", Height=550µm, Lifecycle Status=Production, Manufacturer Part Number=CRGCQ0805J10K, Mounting Technology="Surface Mount", Number of Terminals=2, Packaging="Cut Tape", Power Rating=125mW, Pricing="1=0.1, 10=0.031, 25=0.0232, 50=0.0188, 100=0.0153, 250=0.01204, 500=0.01016, 1000=0.00868 (USD)", REACH SVHC=Yes, RoHS=Compliant, Schedule B="8533210025, 8533210025|8533210025|8533210025|8533210025|8533210025, 8533210045", Stock=448725, Supplier=DigiKey, Voltage Rating=150V, Voltage Rating (DC)=150V, Width=1.25mm, Working Voltage=150V
R2: library part 1623173-1, "Res Thick Film 0805 2K Ohm 1% 0.125W(1/8W) ±100ppm/C Pad SMD T/R", Case Code (Imperial)=0805, Case Code (Metric)=2012, Manufacturer="TE Connectivity", Manufacturer Lifecycle Status=ACTIVE, Max Operating Temperature=155°C, Max Power Dissipation=125mW, Min Operating Temperature=-55°C, Number of Resistors=1, Operating Supply Voltage=150V, Temperature Coefficient=100ppm/°C, Tolerance=1%, Case/Package=0805, Category="Chip SMD Resistors", China RoHS=Non-Compliant, ComponentLink1Description=https://datasheet.octopart.com:443/CRG0805F2K0-TE-Connectivity-datasheet-167977698.pdf?src-supplier=IHS, ComponentLink1URL=https://datasheet.octopart.com:443/CRG0805F2K0-TE-Connectivity-datasheet-167977698.pdf?src-supplier=IHS, ComponentLink2Description=https://datasheet.octopart.com:443/1623173-1-TE-Connectivity---AMP-datasheet-11120284.pdf?src-supplier=Newark, ComponentLink2URL=https://datasheet.octopart.com:443/1623173-1-TE-Connectivity---AMP-datasheet-11120284.pdf?src-supplier=Newark, ComponentLink3Description=https://datasheet.octopart.com:443/1623173-1-TE-Connectivity---AMP-datasheet-44624597.pdf?src-supplier=Newark, ComponentLink3URL=https://datasheet.octopart.com:443/1623173-1-TE-Connectivity---AMP-datasheet-44624597.pdf?src-supplier=Newark, ComponentLink4Description=https://datasheet.octopart.com:443/1623173-1-TE-Connectivity---AMP-datasheet-128558484.pdf?src-supplier=Master+Electronics, ComponentLink4URL=https://datasheet.octopart.com:443/1623173-1-TE-Connectivity---AMP-datasheet-128558484.pdf?src-supplier=Master+Electronics, ComponentLink5Description=https://datasheet.octopart.com:443/1623173-1-TE-Connectivity---AMP-datasheet-189108518.pdf?src-supplier=Master+Electronics, ComponentLink5URL=https://datasheet.octopart.com:443/1623173-1-TE-Connectivity---AMP-datasheet-189108518.pdf?src-supplier=Master+Electronics, ComponentLink6Description=https://datasheet.octopart.com:443/1623173-1-TE-Connectivity-datasheet-14528760.pdf?src-supplier=TE+Connectivity, ComponentLink6URL=https://datasheet.octopart.com:443/1623173-1-TE-Connectivity-datasheet-14528760.pdf?src-supplier=TE+Connectivity, ComponentLink7Description=https://datasheet.octopart.com:443/CRG0805F2K0-Tyco-Electronics-datasheet-11120141.pdf?src-supplier=TE+Connectivity, ComponentLink7URL=https://datasheet.octopart.com:443/CRG0805F2K0-Tyco-Electronics-datasheet-11120141.pdf?src-supplier=TE+Connectivity, ComponentLink8Description=https://datasheet.octopart.com:443/1623173-1-TE-Connectivity-datasheet-177731334.pdf?src-supplier=Burklin+Elektronik, ComponentLink8URL=https://datasheet.octopart.com:443/1623173-1-TE-Connectivity-datasheet-177731334.pdf?src-supplier=Burklin+Elektronik, ComponentLink9Description=https://datasheet.octopart.com:443/CRG0805F2K0-TE-Connectivity-datasheet-137111065.pdf?src-supplier=X-ON, ComponentLink9URL=https://datasheet.octopart.com:443/CRG0805F2K0-TE-Connectivity-datasheet-137111065.pdf?src-supplier=X-ON, ComponentLink10Description=http://sigma.octopart.com:80/14528759/rohs_certificate/TE-Connectivity-CRG0805F2K0.pdf?src-supplier=Compliance+Statements, ComponentLink10URL=http://sigma.octopart.com:80/14528759/rohs_certificate/TE-Connectivity-CRG0805F2K0.pdf?src-supplier=Compliance+Statements, ComponentLink11Description=http://sigma.octopart.com:80/38872762/materials_sheet/TE-Connectivity-CRG0805F2K0.pdf?src-supplier=Compliance+Statements, ComponentLink11URL=http://sigma.octopart.com:80/38872762/materials_sheet/TE-Connectivity-CRG0805F2K0.pdf?src-supplier=Compliance+Statements, ComponentLink12Description=http://sigma.octopart.com:80/78339156/materials_sheet/TE-Connectivity-CRG0805F2K0.pdf?src-supplier=Compliance+Statements, ComponentLink12URL=http://sigma.octopart.com:80/78339156/materials_sheet/TE-Connectivity-CRG0805F2K0.pdf?src-supplier=Compliance+Statements, Composition="Thick Film", Depth=1.25mm, ELV=Compliant, Height=550µm, Length=2mm, Lifecycle Status=Production, Manufacturer Part Number=1623173-1, Military Standard=Not, Mounting Technology="Surface Mount", Number of Terminals=2, Number of Terminations=2, Packaging="Tape & Reel (TR)", Power Dissipation=125mW, Power Rating=125mW, Pricing="20000=0.005 (USD)", Radiation Hardening=No, REACH SVHC=Yes, RoHS=Compliant, Stock=75000, Supplier=Newark, Supplier Part Number=1623173-1, Termination=Solder, Voltage Rating=150V, Width=1.25mm, Working Voltage=150V
U1: "WLAN+BT Module 2412MHz to 2484MHz 47-Pin SMD Module", Manufacturer="Espressif Systems", Max Operating Temperature=85°C, Max Supply Voltage=3.6V, Min Operating Temperature=-40°C, Min Supply Voltage=3V, Operating Supply Voltage=3.3V, Supplier Part Number=1965-ESP32-WROOM-32E-N4CT-ND, Category="RF Transceiver Modules and Modems", ComponentLink1Description=https://datasheet.octopart.com:443/ESP32-WROOM-32E-N4-Espressif-Systems-datasheet-182247776.pdf?src-supplier=IHS, ComponentLink1URL=https://datasheet.octopart.com:443/ESP32-WROOM-32E-N4-Espressif-Systems-datasheet-182247776.pdf?src-supplier=IHS, ComponentLink2Description=https://datasheet.octopart.com:443/ESP32-WROOM-32E-N4-Espressif-Systems-datasheet-188867343.pdf?src-supplier=TME, ComponentLink2URL=https://datasheet.octopart.com:443/ESP32-WROOM-32E-N4-Espressif-Systems-datasheet-188867343.pdf?src-supplier=TME, ComponentLink3Description=https://datasheet.octopart.com:443/ESP32-WROOM-32E-N4-Espressif-Systems-datasheet-165560559.pdf?src-supplier=TME, ComponentLink3URL=https://datasheet.octopart.com:443/ESP32-WROOM-32E-N4-Espressif-Systems-datasheet-165560559.pdf?src-supplier=TME, ComponentLink4Description=https://datasheet.octopart.com:443/ESP32-WROOM-32E-N4-Espressif-Systems-datasheet-151884363.pdf?src-supplier=Future+Electronics, ComponentLink4URL=https://datasheet.octopart.com:443/ESP32-WROOM-32E-N4-Espressif-Systems-datasheet-151884363.pdf?src-supplier=Future+Electronics, Height - Seated (Max)=3.25mm, Length=25.5mm, Manufacturer Part Number=ESP32-WROOM-32E-N4, Number of Terminals=38, Pricing="1=4.84, 10=4.189, 25=3.9612, 100=3.649, 250=3.46184 (USD)", REACH SVHC=Yes, RoHS=Compliant, Stock=39100, Supplier=DigiKey, Terminal Pitch=1.27mm, Width=18mm
U5: "Usb Connector, 5 Contact(S), Female, Right Angle, Surface Mount Terminal, Locking, Receptacle", Contact Resistance=10mΩ, Current Rating=1.8A, Insulation Resistance=100MΩ, Manufacturer="Amphenol Communications Solutions", Manufacturer Part Number=10104110-0001LF, Max Operating Temperature=80°C, Max Voltage Rating (AC)=100V, Min Operating Temperature=-55°C, Supplier Part Number=609-4052-1-ND, Category="USB Connectors", China RoHS=Compliant, ComponentLink1Description=https://datasheet.octopart.com:443/10104110-0001LF-Amphenol-Communications-Solutions-datasheet-96019471.pdf?src-supplier=element14+APAC, ComponentLink1URL=https://datasheet.octopart.com:443/10104110-0001LF-Amphenol-Communications-Solutions-datasheet-96019471.pdf?src-supplier=element14+APAC, ComponentLink2Description=https://datasheet.octopart.com:443/10104110-0001LF-Amphenol-Communications-Solutions-datasheet-11971448.pdf?src-supplier=IHS, ComponentLink2URL=https://datasheet.octopart.com:443/10104110-0001LF-Amphenol-Communications-Solutions-datasheet-11971448.pdf?src-supplier=IHS, ComponentLink3Description=https://datasheet.octopart.com:443/10104110-0001LF-Amphenol-Communications-Solutions-datasheet-13707371.pdf?src-supplier=Electro+Sonic, ComponentLink3URL=https://datasheet.octopart.com:443/10104110-0001LF-Amphenol-Communications-Solutions-datasheet-13707371.pdf?src-supplier=Electro+Sonic, ComponentLink4Description=https://datasheet.octopart.com:443/10104110-0001LF-Amphenol-Communications-Solutions-datasheet-13702204.pdf?src-supplier=RS+(Formerly+Allied+Electronics), ComponentLink4URL=https://datasheet.octopart.com:443/10104110-0001LF-Amphenol-Communications-Solutions-datasheet-13702204.pdf?src-supplier=RS+(Formerly+Allied+Electronics), Connector Type="Receptacle, USB", Contact Gender=Female, Contact Material="Gold, Nickel", Contact Plating=Gold, Depth=5.6mm, Gender=Receptacle, Height=2.99mm, Housing Material=Thermoplastic, Lead Free="Lead Free", Length=8.06mm, Lifecycle Status=Production, Mounting Technology="Horizontal, Surface Mount", Number of Contacts=5, Number of Ports=1, Number of Positions=5, Number of Rows=1, Number of Terminals=5, Orientation="Right Angle", Pins=5, Pitch=650µm, Plating Thickness=762nm, Pricing="1=0.81, 10=0.687, 25=0.6436, 50=0.613, 100=0.5836, 250=0.547, 500=0.52088 (USD)", Radiation Hardening=No, REACH SVHC=Yes, RoHS=Compliant, Shell Finish=Tin, Shell Material="Stainless Steel", Stock=9186, Supplier=DigiKey, Terminal Pitch=660.4µm, Termination=Solder, USB Standard="USB 2.0", Voltage Rating=100V

## Via types
v1: diameter 50, hole 28, Top Layer to Bottom Layer, 34 vias

## Nets (pads, with @x,y where several pads share a name; then routed paths per layer and width w, separated by ;. In a path a pad name is that pad's centre, name@x,y a point inside that pad or via, vN(x,y) a via of type N, cw(c..) or ccw(c..) an arc to the next point about the centre after c; other vN are vias at no path point)
GND: B1.1 B2.1 C1.1 C2.1 C3.2 C4.2 C5.2 C6.1 C7.1 C8.1 D1.1 U1.1 U1.15 U1.32 U1.38 U1.39 U1.40 U1.41 U1.42 U1.43 U1.44 U1.45 U1.46 U1.47 U2.14 U3.1 U3.7 U4.1 U5.5 U5.6 U5.7 U5.8 U5.9 | length 7731.6
  Top Layer w10: U2.14 1045,1725 1045,3250 1079.1,3284.1 U1.1 1350.9,3284.1 1360,3275 1360,3086.57 1465,2981.57 1465,2668.43 1441.57,2645 1430.06,2645 1414.2,2629.14 U1.15 ; D1.1 1285,2125 1320,2160 1388.53,2160 1385,2163.53 v1@1385,2244.22 ; B2.1 1250.87,1320.87 1240,1310 1240,1110 1252.4,1097.6 C2.1 1365.83,1097.6 1393.23,1125 v1(1395,1125) 1395,1065.86 1400.86,1060 U5.8 U5.6 U5.7 U5.9 1860,1060 1870,1070 v1(1870,1125) ; v1@1380,2250 v1(1385.78,2244.22) ; C4.2 C5.2 1636.47,2396.47 C6.1 1685,2400 1700.59,2415.59 C7.1 1770,2413.02 1770,2370 1760,2360 v1(1710,2360) ; C3.2 1513.02,2161.47 U4.1 ; U1.41 U1.42 U1.43 ; U1.40 U1.47 U1.46 ; U1.39 U1.43 ; C8.1 1597.6,1352.4 1633.94,1316.06 B1.1 1853.94,1316.06 1870,1300 v1(1870,1125) ; v1(1635,3100) 1635,3035.4 U1.46 ; U5.5 1681.46,1211.46 1690,1220 1819.14,1220 1825,1214.14 1825,1135 1835,1125 v1(1870,1125) ; v1(1875,2985) 1982.8,2985 U1.32 ; C1.1 1902.4,1092.6 v1(1870,1125) ; U1.38 2125.9,3284.1 2140,3270 U3.1 ; U1.43 U1.44 U1.45 U1.46
  Bottom Layer w10: v1(1875,2985) 2085,2985 2093.5,2976.5 2093.5,2376.5 U3.7
NetB1_2: B1.2 C1.2 C7.2 R1.1 U1.3 U2.2 | length 1087
  Top Layer w10: U2.2 1190,2880 1190,3160 1215,3185 1293.8,3185 U1.3 ; C7.2 1853.43,2409.53 R1.1 1855,2303.43 v1(1855,2205) ; v1(1880,1505) 1935,1505 1960,1480 1960,1323.17 B1.2 1970,1313.17 C1.2
NetB2_2: B2.2 C2.2 C8.2 R3.1 U1.25 U3.14 | length 2470.1
  Top Layer w10: C2.2 1305,1225 1325,1245 1470,1245 1483.58,1258.58 B2.2 1490,1327.28 1490,1470 1504.49,1484.49 1672.4,1484.49 ; C8.2 1672.4,1484.49 ; U1.25 1985,2632.8 1985,1935 ; U3.14 1985,1785 1985,1935 ; 1672.4,1484.49 1672.4,1543.97 R3.1 1678.43,1823.43 1745,1890 1940,1890 1985,1935
NetC3_1: C3.1 R2.2 U2.19 U4.2@1513.94,1979.45 U5.1 | length 1162
  Top Layer w10: C3.1 1390,1925 1405.86,1909.14 1414.14,1909.14 1415,1910 1485,1910 1495,1900 ; U4.2@1513.94,1979.45 1513.94,1918.94 1495,1900 ; U5.1 1579.55,1172.66 1579.55,1279.55 v1(1580,1280) ; v1(1580,1840) R2.2 1495,1841.57 1495,1900
  Bottom Layer w10: U2.19 1325,1130 1395,1200 1519.14,1200 1525,1205.86 1525,1270 1535,1280 v1(1580,1280)
NetC4_1: C4.1 C5.1 C6.2 R1.2 R3.2 U1.2 U2.1 U4.2@1513.94,2070 | length 2613
  Top Layer w10: U1.2 1179.1,3234.1 1140,3195 U2.1 1093.5,2883.5 1093.5,2410.74 1127.75,2376.5 1159.26,2376.5 1212.22,2323.53 C4.1 C5.1 1638.34,2323.53 C6.2 ; U4.2@1513.94,2070 1600,2070 ; R3.2 1601.57,1554.01 1640,1592.44 1640,2030 1600,2070 ; R1.2 1705,2305 1684.8,2325.2 C6.2 ; 1600,2070 1640,2110 C6.2
NetD1_1: D1.2 R2.1 | length 228.3
  Top Layer w10: D1.2 1285,1855 1300,1840 R2.1
NetU1_1: 
NetU1_4: U1.4 U2.3 | length 510.3
  Top Layer w10: U2.3 1210,2800 1210,3120 1225,3135 1293.8,3135 U1.4
NetU1_5: U1.5 U2.4 | length 547.8
  Top Layer w10: U2.4 1230,2720 1230,3070 1244.1,3084.1 U1.5
NetU1_6: U1.6 U2.5 | length 592.2
  Top Layer w10: U2.5 1250,2640 1250,3029.14 1255.86,3035 1293.8,3035 U1.6
NetU1_7: U1.7 U2.6 | length 848.7
  Top Layer w10: U1.7 1334.1,2984.1 v1(1370,3020)
  Bottom Layer w10: U2.6 1210,2500 1210,2985 1245,3020 v1(1370,3020)
NetU1_8: U1.8 U2.7 | length 984.5
  Top Layer w10: U1.8 1337.53,2934.1 1368.43,2965 v1(1415,2965)
  Bottom Layer w10: U2.7 1230,2420 1230,2955 1240,2965 v1(1415,2965)
NetU1_9: U1.9 U2.8 | length 914
  Top Layer w10: U1.9 1339.33,2884.1 1365.23,2910 v1(1370,2910)
  Bottom Layer w10: U2.8 1255,2345 1255,2885 1280,2910 v1(1370,2910)
NetU1_10: U1.10 U2.9 | length 1082.3
  Top Layer w10: U1.10 1307.2,2846.6 1330.03,2846.6 1347.53,2864.1 1347.62,2864.1 1353.52,2870 v1(1425,2870)
  Bottom Layer w10: U2.9 1260,2250 1260,2288.14 1280,2308.14 1280,2860 1290,2870 v1(1425,2870)
NetU1_11: U1.11 U2.10 | length 1027.2
  Top Layer w10: U1.11 1307.2,2796.6 1336.6,2796.6 v1(1370,2830)
  Bottom Layer w10: U2.10 1280,2170 1280,2279.85 1300,2299.85 1300,2824.14 1305.86,2830 v1(1370,2830)
NetU1_12: U1.12 U2.11 | length 1177.3
  Top Layer w10: U1.12 1306.7,2734.1 1324.2,2751.6 1330.41,2751.6 1339.2,2760.39 1339.2,2760.65 1363.55,2785 v1(1425,2785)
  Bottom Layer w10: U2.11 1300,2090 1300,2271.57 1320,2291.57 1320,2770 1335,2785 v1(1425,2785)
NetU1_13: U1.13 U2.12 | length 1096.7
  Top Layer w10: U1.13 1307.2,2696.6 1331.72,2696.6 v1(1370.07,2734.95)
  Bottom Layer w10: U2.12 1210,1900 1210,1970 1320,2080 1320,2263.28 1340,2283.28 1340,2704.88 v1(1370.07,2734.95)
NetU1_14: U1.14 U2.13 | length 1253.7
  Top Layer w10: U1.14 1307.2,2646.6 1331.6,2646.6 1370,2685 v1(1425,2685)
  Bottom Layer w10: U2.13 1340,1930 1340,2255 1360,2275 1360,2670 1375,2685 v1(1425,2685)
NetU1_15: 
NetU1_16: U1.16 U2.15 | length 1205.7
  Top Layer w10: v1(1410,2500) 1451.7,2541.7 1451.7,2572.35 U1.16
  Bottom Layer w10: U2.15 1360,1750 1360,2130 1430,2200 1430,2260 1410,2280 v1(1410,2500)
NetU1_17: U1.17 U2.16 | length 1463.6
  Top Layer w10: v1(1510,2650) 1510,2589.05 U1.17
  Bottom Layer w10: U2.16 1380,1670 1380,2120 1450,2190 1450,2630 1470,2650 v1(1510,2650)
NetU1_18: U1.18 U2.17 | length 1454
  Top Layer w10: v1(1520,2500) 1551.7,2531.7 1551.7,2572.35 U1.18
  Bottom Layer w10: U2.17 1400,1590 1400,2110 1470,2180 1470,2490 1480,2500 v1(1520,2500)
NetU1_19: U1.19 U2.18 | length 1697.1
  Top Layer w10: v1(1590,2650) 1614.2,2625.8 U1.19
  Bottom Layer w10: U2.18 1420,1510 1420,2100 1490,2170 1490,2440 1510,2460 1536.57,2460 1560,2483.43 1560,2620 v1(1590,2650)
NetU1_20: U1.20 U3.19 | length 1782.2
  Top Layer w10: U1.20 1665,2585.65 v1(1665,2650)
  Bottom Layer w10: v1(1665,2650) 1665,2330 1785,2210 1785,2176.72 1815,2146.72 1815,1455 U3.19
NetU1_21: U1.21 U3.18 | length 1555.6
  Top Layer w10: U1.21 1715,2584.05 v1(1715,2510)
  Bottom Layer w10: v1(1715,2510) 1715,2500 1805,2410 1805,2185 1835,2155 1835,1493.43 2093.5,1234.93 2135.07,1234.93 U3.18
NetU1_22: U1.22 U3.17 | length 1613.4
  Top Layer w10: v1(1745,2650) 1751.7,2643.3 1751.7,2597.35 U1.22
  Bottom Layer w10: v1(1745,2650) 1745,2569.59 1760,2554.59 1760,2493.28 1790.78,2462.5 1887.5,2462.5 1910,2440 1910,1560 U3.17
NetU1_23: U1.23 U3.16 | length 1361.9
  Top Layer w10: v1(1805,2510) 1805,2575.65 U1.23
  Bottom Layer w10: v1(1805,2510) 1915,2510 1930,2495 1930,1640 U3.16
NetU1_24: U1.24 U3.15 | length 1351.5
  Top Layer w10: v1(1835,2650) 1861.51,2623.49 1861.51,2587.54 U1.24
  Bottom Layer w10: v1(1835,2650) 1841.57,2643.43 1875,2643.43 1933.43,2585 1947.65,2585 1953.5,2579.14 1953.5,1716.5 U3.15
NetU1_26: U1.26 U3.13 | length 1138.1
  Top Layer w10: v1(1915,2660) 1915,2670 1935,2690 1977.8,2690 U1.26
  Bottom Layer w10: v1(1915,2660) 1958.5,2660 1973.5,2645 1973.5,1896.5 U3.13
NetU1_27: U1.27 U3.12 | length 1107.4
  Top Layer w10: v1(1915,2735) 1982.8,2735 U1.27
  Bottom Layer w10: v1(1915,2735) 1983.5,2735 1993.5,2725 1993.5,1976.5 U3.12
NetU1_28: U1.28 U3.11 | length 1156.2
  Top Layer w10: v1(1870,2785) 1982.8,2785 U1.28
  Bottom Layer w10: v1(1870,2785) 1998.5,2785 2013.5,2770 2013.5,2056.5 U3.11
NetU1_29: U1.29 U3.10 | length 1027.9
  Top Layer w10: v1(1915,2835) 1982.8,2835 U1.29
  Bottom Layer w10: v1(1915,2835) 2018.5,2835 2033.5,2820 2033.5,2136.5 U3.10
NetU1_30: U1.30 U3.9 | length 1060.8
  Top Layer w10: v1(1875,2885) 1982.8,2885 U1.30
  Bottom Layer w10: v1(1875,2885) 2023.5,2885 2053.5,2855 2053.5,2216.5 U3.9
NetU1_31: U1.31 U3.8 | length 945.5
  Top Layer w10: v1(1915,2935) 1982.8,2935 U1.31
  Bottom Layer w10: v1(1915,2935) 2048.5,2935 2073.5,2910 2073.5,2296.5 U3.8
NetU1_32: 
NetU1_33: U1.33 U3.6 | length 952.2
  Top Layer w10: v1(1915,3035) 1982.8,3035 U1.33
  Bottom Layer w10: v1(1915,3035) 2165,3035 2186.5,3013.5 2186.5,2476.5 U3.6
NetU1_34: U1.34 U3.5 | length 642.5
  Top Layer w10: U1.34 2024.14,3084.1 2030,3078.24 2030,2640 U3.5
NetU1_35: U1.35 U3.4 | length 604.2
  Top Layer w10: U1.35 2044.14,3134.1 2050,3128.24 2050,2720 U3.4
NetU1_36: U1.36 U3.3 | length 566
  Top Layer w10: U1.36 2064.14,3184.1 2070,3178.24 2070,2800 U3.3
NetU1_37: U1.37 U3.2 | length 517
  Top Layer w10: U1.37 2065.9,3234.1 2090,3210 2090,2880 U3.2
pads on no net: B1.3 B1.4 B2.3 B2.4 U4.4 U5.2 U5.3 U5.4

## Polygon pours and split planes (outlines as drawn)
GND on GND (split plane): 2269.9,1020.1 1020.1,1020.1 1020.1,3339.9 2269.9,3339.9
NetB1_2 on PWR (split plane): 1259.93,2793.76 1259.93,2545 1260.22,2542.06 1261.07,2539.23 1262.47,2536.63 1264.34,2534.34 1484.34,2314.34 1486.63,2312.47 1489.23,2311.07 1492.06,2310.22 1495,2309.93 1838.76,2309.93 1894.93,2253.76 1894.93,2230 1894.93,1560 1895.22,1557.06 1896.07,1554.23 1897.47,1551.63 1899.34,1549.34 1919.93,1528.76 1919.93,1476.24 1903.76,1460.07 1846.24,1460.07 1835.07,1471.24 1835.07,1835 1834.78,1837.94 1833.93,1840.77 1832.53,1843.37 1830.66,1845.66 1815.07,1861.24 1815.07,2225 1815.07,2230 1814.78,2232.94 1813.93,2235.77 1812.53,2238.37 1810.66,2240.66 1785.66,2265.66 1783.37,2267.53 1780.77,2268.93 1777.94,2269.78 1775,2270.07 1476.24,2270.07 1240.07,2506.24 1240.07,2740 1239.78,2742.94 1238.93,2745.77 1237.53,2748.37 1235.66,2750.66 1195.66,2790.66 1193.37,2792.53 1190.77,2793.93 1187.94,2794.78 1185,2795.07 1106.24,2795.07 1090.07,2811.24 1090.07,2843.76 1111.24,2864.93 1188.76,2864.93
NetC3_1 on PWR (split plane): 1614.93,1863.76 1614.93,1246.24 1613.76,1245.07 1566.24,1245.07 1560.07,1251.24 1560.07,1795 1560.07,1868.76 1571.24,1879.93 1598.76,1879.93
no net on PWR (split plane): 2269.9,1020.1 1020.1,1020.1 1020.1,3339.9 2269.9,3339.9

## Other copper
PWR (plane layer: these items are gaps in the copper):
  lines w30: 1075,2805 1075,2850 1105,2880 1195,2880 1275,2800 1275,2545 1495,2325 1845,2325 1910,2260 1910,2230 1910,1560 1935,1535 1935,1470 1910,1445 1840,1445 1820,1465 1820,1835 1800,1855 1800,2225 1800,2230 1775,2255 1470,2255 1225,2500 1225,2740 1185,2780 1100,2780 1075,2805 ; 1545,1245 1545,1795 1545,1875 1565,1895 1605,1895 1630,1870 1630,1240 1620,1230 1560,1230 1545,1245

## Silkscreen, mask and mechanical layers (free items; w line width, h text height)
Top Overlay:
  text "GND" at 2215,2945 h20 r270
  text "3V3" at 1065,2905 h20 r90
  text "23" at 2215,2841.66 h20 r270
  text "EN" at 1065,2810 h20 r90
  text "22" at 2215,2740 h20 r270
  text "VP" at 1065,2705 h20 r90
  text "TX" at 2215,2635 h20 r270
  text "VN" at 1065,2610 h20 r90
  text "RX" at 2215,2541.67 h20 r270
  text "34" at 1065,2505 h20 r90
  text "21" at 2215,2421.67 h20 r270
  text "35" at 1065,2410 h20 r90
  text "GND" at 2215,2351.66 h20 r270
  text "32" at 1065,2305 h20 r90
  text "19" at 2215,2235 h20 r270
  text "33" at 1065,2210 h20 r90
  text "18" at 2215,2138.33 h20 r270
  text "25" at 1065,2105 h20 r90
  text "5" at 2215,2025 h20 r270
  text "26" at 1065,2010 h20 r90
  text "17" at 2215,1938.33 h20 r270
  text "27" at 1065,1905 h20 r90
  text "15" at 2215,1833.33 h20 r270
  text "14" at 1065,1810 h20 r90
  text "4" at 2215,1730 h20 r270
  text "12" at 1065,1705 h20 r90
  text "0" at 2215,1625 h20 r270
  text "GND" at 1065,1610 h20 r90
  text "2" at 2215,1530 h20 r270
  text "13" at 1065,1505 h20 r90
  text "15" at 2215,1433.33 h20 r270
  text "D2" at 1065,1410 h20 r90
  text "D1" at 2215,1336.67 h20 r270
  text "D3" at 1065,1305 h20 r90
  text "D9" at 2215,1235 h20 r270
  text "CMD" at 1065,1210 h20 r90
  text "CLK" at 2215,1140 h20 r270
  text "5V" at 1065,1110 h20 r90

## Text inside footprints (layer, text, board x,y; h text height)
U1: Top 3D Body "*" at 1336.7,3259.1 h50; Top Overlay "*" at 1227.7,3259.1 h50
U5: Mechanical 6 "PCB EDGE" at 1310.28,996.1 h11.81